# Altium PCB Smart-Car.PcbDoc (part 2 of 2)
Units mil, origin at the board's own origin, x right, y up, seen from the top; angles counter-clockwise.
Board outline 3864.45 x 1894.79 mil, 4 copper layers (Top Layer, Signal Layer 1, GND, Bottom Layer), stack 36.221 mil thick; 161 components, 132 nets, 578 pads, 430 vias.
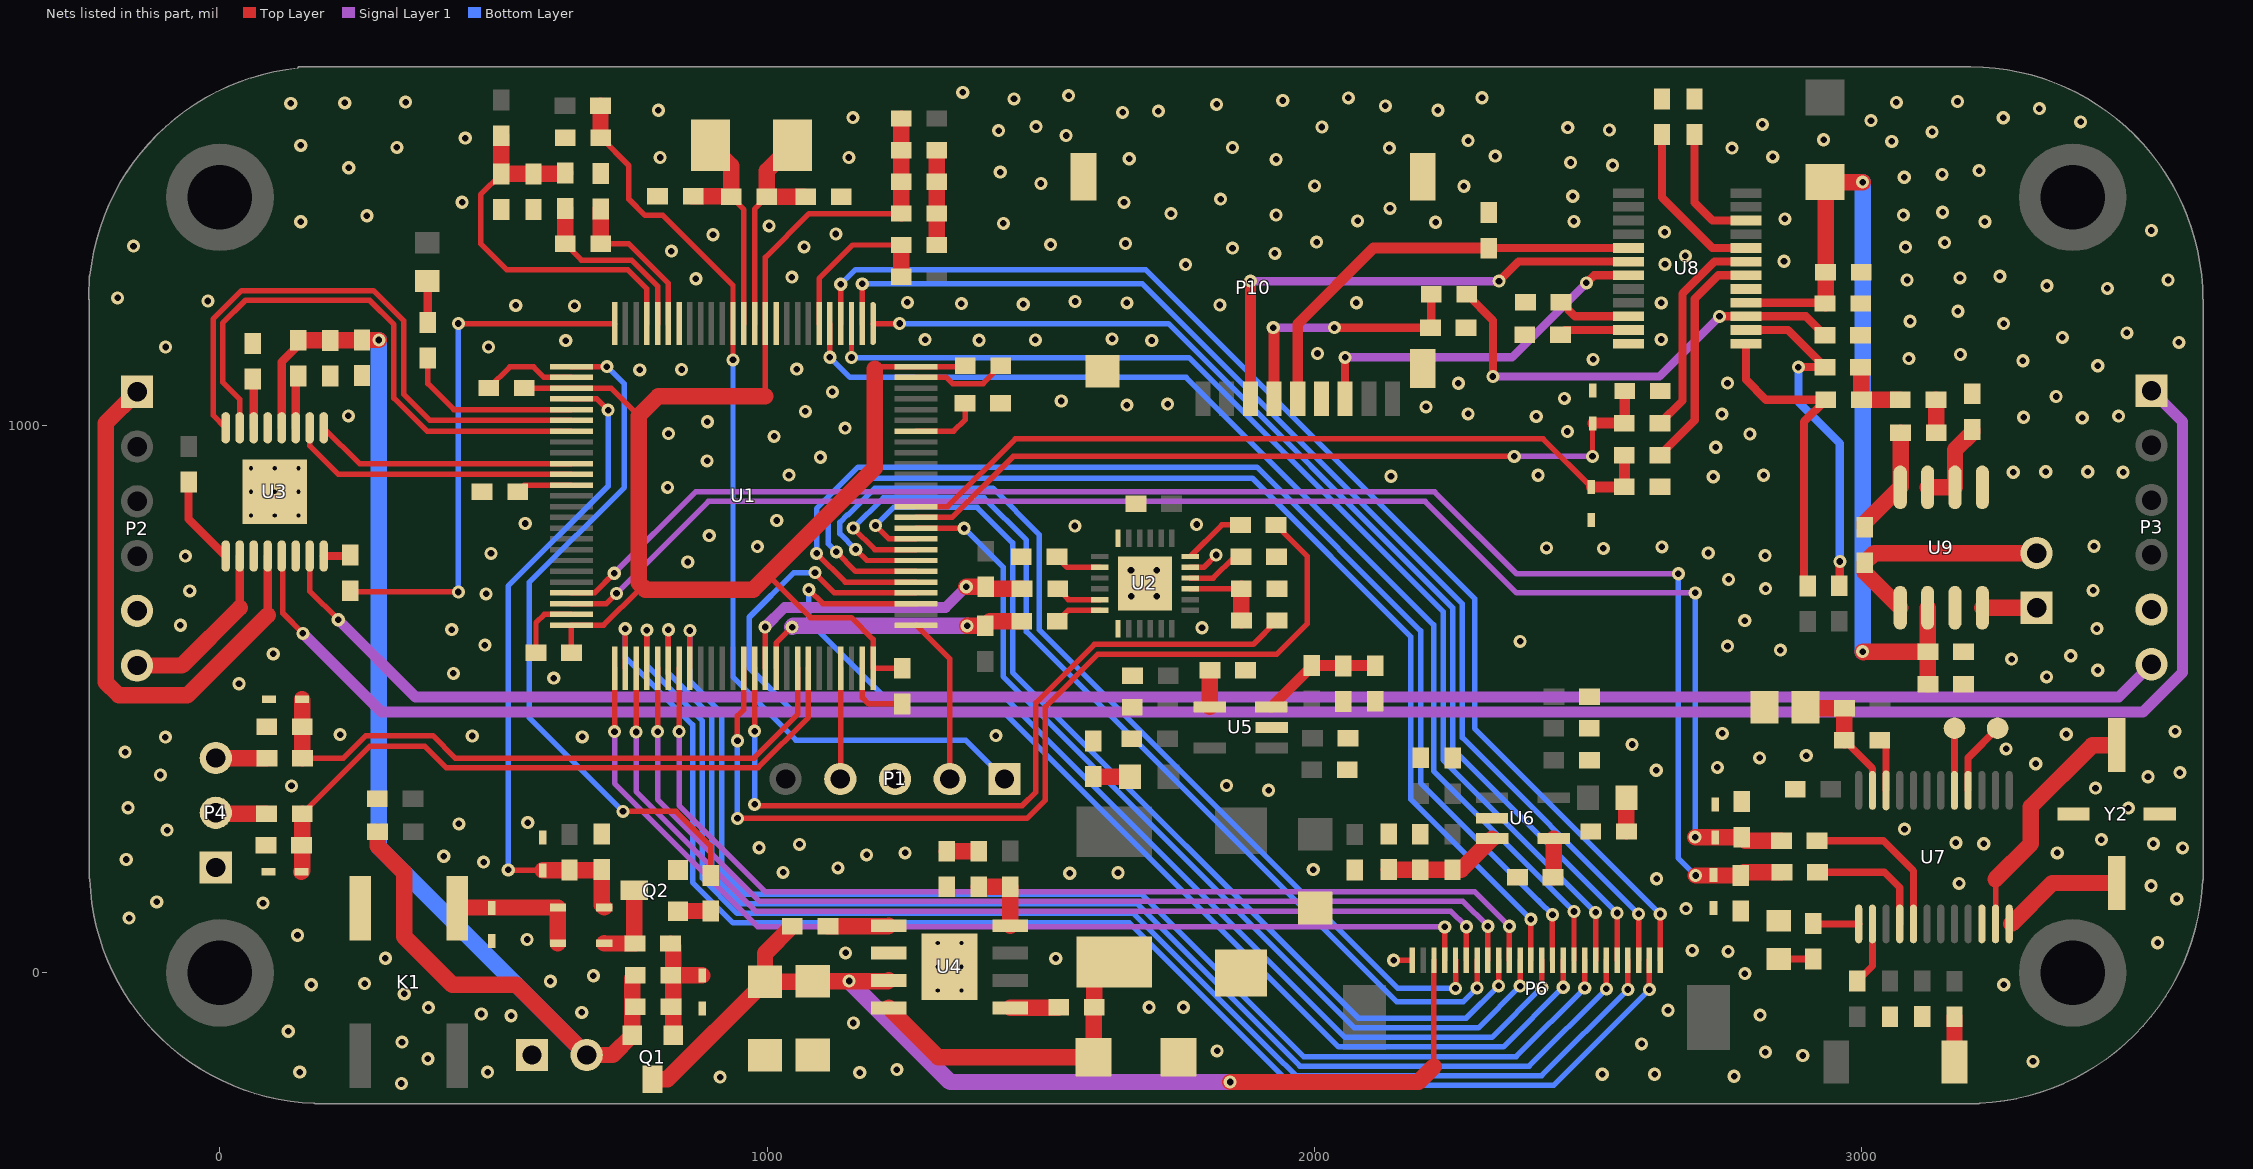
[diagram p4: the nets of this part, all layers, seen from the top]

## Via types
v1: diameter 24, hole 12, Top Layer to Bottom Layer, tented both sides, 415 vias
v2: diameter 19.68, hole 7.87, Top Layer to Bottom Layer, tented both sides, 15 vias

## Nets (pads, with @x,y where several pads share a name; then routed paths per layer and width w, separated by ;. In a path a pad name is that pad's centre, name@x,y a point inside that pad or via, vN(x,y) a via of type N, cw(c..) or ccw(c..) an arc to the next point about the centre after c; other vN are vias at no path point) (continued)
GND: C1.2 C2.1 C3.1 C4.1 C5.1 C6.1 C7.1 C8.1 C9.1 C10.1 C11.1 C12.1 C13.1 C15.1 C16.1 C17.1 C18.1 C19.2 C20.1 C22.1 C23.1 C25.1 C26.1 C27.2 C28.1 C29.2 C30.1 C31.1 C32.1 C33.1 C34.1 C35.1 C36.1 C38.1 C39.1 C40.1 C41.1 C42.1 C43.1 C44.1 C45.1 C46.1 C47.2 C49.2 C51.1 C52.1 C53.1 C54.1 C55.1 C56.1 C57.1 C58.1 C59.1 C60.1 C61.1 C64.1 C65.1 D2.1 D7.2 ESD1.1 ESD2.1 ESD3.1 ESD4.1 ESD5.1 ESD6.1 ESD7.1 ESD8.1 ESD9.1 K1.3 P1.3 P2.5 P3.5 P4.1 P5.1 P6.24 P10.0 P10.6 Q2.3 R2.2 R3.2 R7.1 R14.1 R15.1 R25.1 R28.1 R29.1 R34.1 R35.1 R43.1 R44.1 R45.1 R49.1 U1.10 U1.19 U1.27 U1.49 U1.74 U1.99 U2.1 U2.11 U2.18 U2.25 U3.3 U3.6 U3.13 U3.17 U4.6 U4.9 U5.2 U6.2 U7.22 U8.5 U8.24 U9.1 U9.7 Y2.3 Y2.4 | length 869.1
  Top Layer w10: C4.1@491.18,1068.78 529.7,1107.3 573.1,1107.3 592.16,1088.24 U1.27@642.35,1088.24 ; C3.1@577.58,585.28 577.58,639.98 592.77,655.17 U1.49@642.35,655.17 ; U1.74@1173.84,556.74 1173.84,503.16 1185.42,491.58 C2.1@1246.98,491.58 ; U1.99@1272.27,1088.24 1327.66,1088.24 1339.1,1076.8 1394.5,1076.8 C6.1@1426.88,1109.18 ; U2.11@1773.2,741.26 1798.06,741.26 v1(1820.4,763.6) ; v1(2144.8,23) P6.24@2179.23,23
  Top Layer w30: C9.1@1310.08,1330.18 C5.1@1310.08,1387.68 C10.1@1310.08,1446.08 C11.1@1310.08,1503.38
  other v1: 331.7,-202.2 914,-190.4 2767,-188.9 2526.2,-185.3 2621.8,-185.3 1169.3,-182.2 145.9,-181.2 489.1,-181.2 1237.2,-176.7 3313.3,-161.7 380,-157 2892.4,-151 2824.3,-144.7 1822.4,-142.5 2597.9,-129.8 332.7,-126.6 124.9,-106.6 1157.5,-91.6 532.2,-78.3 2814.7,-77.2 477.6,-75.1 661.1,-72.3 2646.3,-68.2 381,-63.6 1698.1,-62.8 1760.7,-62.8 336.9,-38.4 166.9,-21.6 3259.9,-21.6 264.5,-19.5 604,-15.2 682.4,-5.3 2786.7,-1.3 1527.3,26.4 302.3,26.7 1143.4,36.6 2756.2,39.3 2690.5,41.1 3540.9,55.1 561.3,61 141.7,68.7 -165.9,100.2 2679.1,117.5 78.7,127.5 -115.5,129.6 3575.9,135.1 3529.2,159.3 3178.2,163.5 2625.4,171.9 1552.9,182 1641.2,183 1029.3,183.5 1998,188.7 1129.3,191.8 481.8,202.3 -171.2,207.2 409,213.1 1181.7,215.6 1252,219.2 3357.5,219.3 985.2,228.7 3586.7,228.5 1059.1,234.7 3223.2,236 3533.4,236 3172.4,237.7 3438.3,243.5 -96.6,260.8 3078.5,262.7 436.8,272.3 562.6,274.5 3487.5,301 -168,301.7 1916.4,333.8 3427.5,337.7 130.8,341.7 1839.5,342.4 3523.4,358.5 -108.7,361.6 3581.7,366 2624.8,370.2 2736.5,375.6 3318.3,382.1 2813.6,392.9 2899,397.1 -173.3,403.5 3264.1,409.4 2580.6,417.4 -99.8,430.8 662.1,431.3 461,432.9 1418.1,433.6 219.6,435.3 3374,436 2745.5,437.7 3573,441.2 34.8,528.3 610.1,538.6 3338.1,540.8 426.7,547.4 3431.6,553 3274.2,573.5 3382.2,579.6 97.4,582.8 2851.7,589.8 2755,597.2 484.3,599 2376,605.7 423.7,627.2 3430.1,629 1794.7,630.6 -72.3,635.3 2786.6,643.7 1665.3,688 1711.6,688 486.3,692.5 -55.1,698 3423.2,699 2824.7,702.2 2756.9,719 1664.9,735.4 1712.1,735.8 854.8,750.9 -63.2,761.6 2823.8,762.6 495.4,766.6 2719.7,767.3 2528.2,775.7 2424.2,776.6 2635.1,778.4 982.3,778.9 3424.7,779.6 894.3,799.1 1562.3,816.7 1784.9,819.4 558,821.2 1017.5,826.7 818.1,887.1 2729,906.7 2140.1,907.5 2409,909.3 1040,909.6 2821,909.5 3277.2,914.9 3478,914.9 3336.5,915.7 3413.3,915.7 890.4,935.6 1097.2,942.4 2733.6,960.6 1012.7,980.3 819.7,985.4 2795.9,984.8 2462.4,989.4 1142.6,995.6 890.8,1007.1 3296.2,1015.3 3403.4,1014.5 2405.4,1017 234.8,1017.9 3469.6,1017.6 2744.8,1021 2281,1021.5 1070,1026 2204,1034.4 1657.4,1037.5 1731.9,1039.4 1537.5,1045.1 2457,1049.9 3355.5,1053.3 1119.3,1061.6 2263.3,1077.5 2755,1077.7 767.2,1101.8 843.8,1102.6 1054.2,1103.4 3431.6,1109.6 3294.7,1118.7 2509.3,1121 3086.4,1122.5 3180.7,1130.1 2005.8,1131.9 -99.4,1143.7 490.8,1143.7 3579.8,1152.2 631.9,1155.4 1387.3,1156.2 1702.8,1155.6 1288.8,1157.4 1490.2,1156.8 2634,1157.5 1630.3,1158.7 3367,1161.3 3484.8,1169.6 3259.7,1186.4 3088.7,1190.9 3176.1,1209.2 648,1219 540.5,1219.7 1827.4,1220.5 1468.1,1221.8 1355.1,1223.1 1657.4,1224.3 2634,1224.4 1256.3,1225.4 2076.9,1224.6 1562.7,1226.9 -21.9,1227.8 -187.1,1233.6 3449.1,1251 3338.8,1255.6 3083.3,1266.2 3560.1,1266.2 869.7,1268.6 3179.9,1270 1045.2,1271.5 3252.9,1273 1764.6,1294.3 2640.8,1295.1 2858.3,1300.4 2678.1,1310.3 1927.8,1314.8 825.1,1319.1 1850.4,1324.5 3080.3,1326.3 1067.5,1326.6 -157.9,1328 1518,1331 1654.9,1332.9 2004,1335.4 3151.8,1334.6 901,1348.9 1125.5,1350.3 2640.1,1353.6 3529.7,1356.7 1003.6,1365.2 1431.8,1369.7 2221.7,1371.7 147.8,1372.6 2474.3,1373.3 3225.5,1372.6 2079,1374.1 2859.8,1378 268.5,1383.5 1930.2,1385 3076.5,1384.8 1738,1387.4 3148,1390.1 2138.2,1397.1 442.5,1408.4 1652.1,1408 1828.7,1414 2472.2,1419.3 2000.4,1438.2 2273.3,1437.6 1500.2,1442.5 3078,1454 3147.2,1459.3 1425.9,1463.4 3214.9,1466.2 235.5,1471.3 2545.1,1476 2468.4,1480.9 1930.2,1486.6 1661.8,1487.8 804.3,1490.1 1149.3,1490.1 2837.8,1491.3 2330.6,1492.7 2137,1507.1 2763.2,1507.2 1850.4,1508.3 323.3,1508.6 147.8,1512.2 3055.2,1519.4 2280.9,1520.8 2930.5,1522.4 448.3,1525.4 1546.3,1530.3 3129,1536.9 1422.9,1539.2 2539.2,1540.3 2463,1544.6 2013.7,1545.8 1491.3,1546.6 2818.8,1550.6 3400.4,1555.1 3017.2,1557.4 1156.7,1563 3259,1562.7 1649.7,1572.4 1715,1574.9 801.3,1576.4 2225.8,1576.5 3325.1,1579.5 2129.8,1584.5 1821.4,1587 129.5,1589 228.2,1589.8 339.4,1591.2 3063.6,1590.9 3175.3,1592.4 1942.3,1594.2 1451.1,1597.2 2062.1,1599 2306.3,1599.2 1550.8,1603.1 1357.5,1609.1
  other v2: 1311.73,-32.13 1355.03,-32.13 1311.73,11.18 1355.03,11.18 1311.73,54.48 1355.03,54.48 56.79,835.69 100.1,835.69 143.41,835.69 56.79,878.99 100.1,878.99 143.41,878.99 56.79,922.3 100.1,922.3 143.41,922.3
IOB: R44.2 U8.8 | length 306.7
  Top Layer w15: R44.2@2635.3,1532 2635.3,1416.7 2727.2,1324.8 U8.8@2788.67,1324.8
IOC: R45.2 U8.10 | length 231.9
  Top Layer w15: R45.2@2694.7,1532 2694.7,1407.7 2727.6,1374.8 U8.10@2788.67,1374.8
KEY-EINT: C38.2 D5.1 ESD4.2 R27.1 U1.29 | length 1234.4
  Top Layer w10: v1(526.8,188.2) 527.52,187.48 ESD4.2@589.68,187.48 ; U1.29@642.35,1048.87 688.83,1048.87 v1(709.3,1028.4)
  Top Layer w30: ESD4.2@589.68,187.48 696.38,187.48 C38.2@697.78,188.88 697.78,124.1 D5.1@702.4,119.48
  Bottom Layer w10: v1(526.8,188.2) 526.8,706.8 709.3,889.3 v1(709.3,1028.4)
LED: R20.1 U1.30 | length 329.2
  Top Layer w10: R20.1@379.9,1123.8 379.9,1076.7 427.42,1029.18 U1.30@642.35,1029.18
M1-BOOT0: R2.1 U1.94 | length 128
  Top Layer w10: U1.94@1272.27,989.81 1340.71,989.81 1361.6,1010.7 R2.1@1361.6,1040.7
M1-BOOT1: R3.1 U1.37 | length 103.3
  Top Layer w10: R3.1@544.1,879.1 556.39,891.39 U1.37@642.35,891.39
M1-REST: C1.1 P1.1 R1.2 U1.14 | length 1737.3
  Top Layer w10: C1.1@695.98,1526.28 747.1,1475.16 747.1,1414.1 776.9,1384.3 809.7,1384.3 937.62,1256.38 U1.14@937.62,1186.66 v1(937.62,1120.18)
  Top Layer w30: R1.2@695.48,1584.98 695.48,1526.78 C1.1@695.98,1526.28
  Bottom Layer w10: v1(937.62,1120.18) 937.62,540.28 1052.4,425.5 1362.56,425.5 P1.1@1433.68,354.38
M1-SWCLK: P1.2 U1.76 | length 306.5
  Top Layer w10: U1.76@1272.27,635.48 1333.68,574.07 P1.2@1333.68,354.38
M1-SWDIO: P1.4 U1.72 | length 202.7
  Top Layer w10: P1.4@1133.68,354.38 1134.47,355.17 U1.72@1134.47,556.74
M1-VBAT: C9.2 R5.2 U1.6 | length 315.4
  Top Layer w10: U1.6@1095.1,1186.66 1095.1,1268.9 1156.38,1330.18 C9.2@1245.08,1330.18
  Top Layer w30: R5.2@1245.08,1272.38 C9.2@1245.08,1330.18
M1-VDD: C2.2 C3.2 C4.2 C5.2 C6.2 C10.2 C11.2 L1.2 U1.11 U1.28 U1.50 U1.75 U1.100 | length 2928
  Top Layer w10: C4.2@556.18,1068.78 556.4,1068.55 U1.28@642.35,1068.55 714.95,1068.55 765.4,1018.1 ; C3.2@642.58,585.28 642.35,585.51 U1.50@642.35,635.48 701.33,635.48 766.35,700.5 777.6,700.5 782.5,700.5 ; 996.68,1053.7 U1.11@996.68,1186.66 996.68,1307.48 1076.88,1387.68 C5.2@1245.08,1387.68 ; 1000,726 1002.1,726 1079,649.1 1153.8,649.1 1193.53,609.37 U1.75@1193.53,556.74 1193.69,556.58 C2.2@1246.98,556.58 ; 1196.6,1103.7 1200.82,1107.92 U1.100@1272.27,1107.92 1360.63,1107.92 C6.2@1361.88,1109.18
  Top Layer w30: 777.6,700.5 765.4,712.7 765.4,1018.1 801,1053.7 996.68,1053.7 ; 782.5,700.5 974.5,700.5 1000,726 1196.6,922.6 1196.6,1103.7 ; C5.2@1245.08,1387.68 L1.2@1245.08,1561.28
M1-VDDA: C12.2 C13.2 L2.2 R6.1 U1.22 | length 731.7
  Top Layer w10: C13.2@514.28,1460.08 476.4,1422.2 476.4,1332.61 524,1285.01 745.09,1285.01 780.14,1249.96 U1.22@780.14,1186.66
  Top Layer w30: L2.2@514.28,1529.88 C13.2@514.28,1460.08 C12.2@572.98,1460.08 629.48,1460.08 R6.1@631.08,1461.68
M1-VREF+: C14.2 R6.2 U1.21 | length 333.6
  Top Layer w10: C14.2@631.08,1332.08 660.46,1302.7 752.15,1302.7 799.83,1255.02 U1.21@799.83,1186.66
  Top Layer w30: C14.2@631.08,1332.08 R6.2@631.08,1396.68
M1-VREF-: C14.1 R7.2 U1.20 | length 290.7
  Top Layer w10: C14.1@696.08,1332.08 747.52,1332.08 819.51,1260.09 U1.20@819.51,1186.66
  Top Layer w30: R7.2@695.88,1395.98 695.88,1332.28 C14.1@696.08,1332.08
MPU_AD0: R16.1 U1.64 | length 1441.5
  Top Layer w10: v1(976.99,307.99) 976.99,305.7 1466.2,305.7 1490.9,330.4 1490.9,493.55 1597.85,600.5 1888.34,600.5 R16.1@1931.78,643.94 ; v1(976.99,441.69) U1.64@976.99,556.74
  Bottom Layer w10: v1(976.99,307.99) v1(976.99,441.69)
MPU_INT: R13.1 U1.63 | length 1771.8
  Top Layer w10: v1(945.8,282.2) 1474.7,282.2 1508.4,315.9 1508.4,486.3 1604.5,582.4 1931.6,582.4 1986.8,637.6 1986.8,761.82 R13.1@1930.08,818.54 ; v1(945.8,424.3) 945.8,469.5 957.31,481.01 U1.63@957.31,556.74
  Bottom Layer w10: v1(945.8,282.2) v1(945.8,424.3)
NetC16_2: C16.2 U2.20 | length 86.1
  Top Layer w10: C16.2@1529.48,760.14 1548.35,741.26 U2.20@1607.76,741.26
NetC17_2: C17.2 U2.10 | length 108.5
  Top Layer w10: U2.10@1773.2,721.58 1815.02,721.58 1853.68,760.24 C17.2@1865.68,760.24
NetC19_1: C19.1 U3.14 | length 90.1
  Top Layer w15: C19.1@59.8,1085.39 61.71,1083.48 U3.14@61.71,996.12
NetC21_1: C21.1 U3.11 | length 98.3
  Top Layer w15: U3.11@138.49,996.12 138.49,1086.69 C21.1@142.8,1091 C21.1@141.2,1091
NetC24_1: C24.1 U4.1 | length 88.7
  Top Layer w30: U4.1@1444.6,-63.82 1531.98,-63.82 C24.1@1532.88,-62.92
NetC24_2: C24.2 D2.2 L3.1 U4.8 | length 601.7
  Top Layer w30: U4.8@1222.16,-63.82 1312.63,-154.3 D2.2@1596.6,-154.3 1596.6,-64.2 C24.2@1597.88,-62.92 1597.88,-16.12 L3.1@1633.98,19.98
NetC35_2: C35.2 R26.1 R28.2 U5.3 | length 222.9
  Top Layer w20: U5.3@1921.2,485.9 1995.18,559.87 R26.1@1995.18,561.68 2111.28,561.68 C35.2@2111.58,561.38
NetC36_2: C36.2 U5.4 | length 67
  Top Layer w30: U5.4@1809,485.9 1809.1,486 C36.2@1809.1,552.9
NetC37_2: C37.2 ESD3.2 Q1.1 R30.1 R31.2 | length 227.4
  Top Layer w30: R30.1@823.48,53.68 828.58,48.58 C37.2@828.58,-4.42 ; C37.2@823.88,-4.42 C37.2@828.58,-4.42 ; Q1.1@828.58,-114.12 C37.2@828.58,-4.42 ; ESD3.2@881.28,-4.72 880.98,-4.42 C37.2@828.58,-4.42
NetC44_2: C44.2 R33.1 R34.2 U6.3 | length 213.1
  Top Layer w30: C44.2@2135.98,188.68 2251.98,188.68 R33.1@2252.38,188.28 2268.18,188.28 U6.3@2325.28,245.38
NetC45_2: C45.2 U6.4 | length 70.8
  Top Layer w30: C45.2@2436.28,175.08 2437.48,176.28 U6.4@2437.48,245.38
NetC53_2: C53.2 U8.23 | length 128.1
  Top Layer w15: C53.2@2449.6,1166.1 2458.3,1174.8 U8.23@2574.1,1174.8
NetC55_2: C55.2 U8.22 | length 134.1
  Top Layer w15: C55.2@2450.6,1225.5 2476.3,1199.8 U8.22@2574.1,1199.8
NetC60_2: C60.2 P10.4 R46.1 | length 478.6
  Top Layer w15: v1(2036.7,1179.1) C60.2@2212.2,1179.1 2213.6,1180.5 R46.1@2213.6,1240.2
  Top Layer w20: P10.4@1926.31,1049.4 v1@1926.31,1179.1
  Signal Layer 1 w15: v1(1925,1179.1) v1(2036.7,1179.1)
NetC61_2: C61.2 U9.2 U9.3 | length 169.1
  Top Layer w30: U9.3@3120.7,887.3 U9.2@3170.7,887.3 3170.7,955.78 3202.6,987.68 C61.2@3202.6,993.2
NetC62_1: C62.1 C63.2 C66.2 | length 131.6
  Top Layer w30: C66.2@2998.3,1107 2999.7,1105.6 C63.2@2999.7,1047.2 3000.1,1047.6 C62.1@3070.8,1047.6
NetC62_2: C62.2 R47.1 | length 60.5
  Top Layer w30: C62.2@3135.8,1047.6 3136.4,1047 R47.1@3136.4,987.3
NetD1_2: D1.2 R20.2 | length 75.8
  Top Layer w15: D1.2@379.2,1264.3 379.9,1263.6 R20.2@379.9,1188.8
NetD3_2: D3.2 R29.2 | length 67.6
  Top Layer w30: R29.2@1595.88,358.78 1662.88,358.78 D3.2@1663.28,358.38
NetD4_1: D4.1 Q2.2 R30.2 | length 154.1
  Top Layer w30: D4.1@702.2,53.78 702.3,53.68 R30.2@758.48,53.68 757.18,54.98 Q2.2@757.18,150.88
NetD4_2: D4.2 D5.2 ESD5.2 K1.1 | length 250.4
  Top Layer w30: K1.1@433.84,117.88 435.44,119.48 D5.2@617.76,119.48 617.56,119.28 D4.2@617.56,53.78
NetD6_2: D6.2 R35.2 | length 62
  Top Layer w30: R35.2@2570.28,258.38 D6.2@2570.28,320.38
NetD7_1: D7.1 R40.2 | length 62.9
  Top Layer w13: D7.1@2848.9,25.3 2849.1,25.1 R40.2@2911.7,25.1
NetP8_1: P8.1 R37.2 | length 82.7
  Top Layer w30: R37.2@3169.8,-80.2 3169.8,-162.46 P8.1@3170.14,-162.8
NetP11_1: P11.1 U9.8 | length 99.2
  Top Layer w30: U9.8@3220.7,667.3 3319.6,667.3 P11.1@3319.8,667.1
NetP11_2: P11.2 R48.2 U9.5 | length 430
  Top Layer w30: U9.5@3070.7,667.3 3006,732 R48.2@3006,749.4 3023.7,767.1 P11.2@3319.8,767.1
NetQ2_1: Q2.1 R32.2 | length 59.7
  Top Layer w30: Q2.1@837.18,112.88 837.38,113.08 R32.2@896.78,113.08
NetR9_2: R9.2 U2.23 | length 84.8
  Top Layer w10: R9.2@1530.98,701.64 1550.41,682.21 U2.23@1607.76,682.21
NetR12_2: R12.2 U2.24 | length 85.7
  Top Layer w10: R12.2@1530.28,642.64 1550.17,662.52 U2.24@1607.76,662.52
NetR13_2: R13.2 U2.12 | length 115.7
  Top Layer w10: U2.12@1773.2,760.95 1830.79,818.54 R13.2@1865.08,818.54
NetR14_2: R14.2 R16.2 U2.9 | length 151.8
  Top Layer w10: U2.9@1773.2,701.89 1866.14,701.89 R14.2@1866.48,702.24
  Top Layer w30: R14.2@1866.48,702.24 1866.48,644.24 R16.2@1866.78,643.94
NetR18_1: R18.1 U3.1 | length 163.2
  Top Layer w15: R18.1@-57.2,897 -57.2,829.6 U3.1@10.53,761.87
NetR21_1: R21.1 U3.8 | length 48.9
  Top Layer w15: U3.8@189.67,761.87 236.27,761.87 R21.1@237.9,763.5
NetR22_2: R22.2 U4.5 | length 111.5
  Top Layer w30: R22.2@1110.98,85.48 1221.46,85.48 U4.5@1222.16,86.18
NetR23_1: R23.1 R24.2 U4.4 | length 129.2
  Top Layer w30: R24.2@1386.78,157.28 1387.08,157.58 R23.1@1444.28,157.58 1444.6,157.26 U4.4@1444.6,86.18
NetR24_1: R24.1 R25.2 | length 58.9
  Top Layer w30: R25.2@1327.88,222.28 R24.1@1386.78,222.28
NetR39_2: R39.2 U7.14 | length 116
  Top Layer w13: R39.2@2992.1,-15.1 3019.8,12.6 U7.14@3019.8,89.41
NetR40_1: R40.1 U7.13 | length 83.4
  Top Layer w13: R40.1@2911.7,90.1 2912.39,89.41 U7.13@2994.8,89.41
NetR47_2: R47.2 R48.1 U9.4 | length 200
  Top Layer w30: R48.1@3006,814.4 3006,822.6 U9.4@3070.7,887.3 3071.4,888 R47.2@3071.4,987.3
NFAULT: R21.2 U1.25 | length 974.8
  Top Layer w10: R21.2@237.9,698.5 240.34,696.06 v1(435.74,696.06) ; v1(435.74,1186.66) U1.25@721.09,1186.66
  Bottom Layer w10: v1(435.74,696.06) v1(435.74,1186.66)
OSCI: U7.23 Y2.1 | length 444.4
  Top Layer w10: U7.23@3244.8,89.41 3244.8,171.4
  Top Layer w30: 3244.8,171.4 3309.1,235.7 3309.1,303.4 3421.88,416.18 Y2.1@3466.2,416.18
OSCO: U7.24 Y2.2 | length 223.4
  Top Layer w30: U7.24@3273.8,89.41 3348.61,164.22 Y2.2@3466.2,164.22
OUTA1: P2.6 U3.2 | length 336.8
  Top Layer w15: 36.12,667.32 U3.2@36.12,761.87
  Top Layer w30: P2.6@-162.4,561.7 P2.6@-151.4,561.7 -69.5,561.7 36.12,667.32
OUTA2: P2.1 U3.4 | length 1029.3
  Top Layer w15: 87.3,653.9 U3.4@87.3,761.87
  Top Layer w30: P2.1@-151.4,1061.7 -208.9,1004.2 -208.9,531 -185.1,507.2 -59.4,507.2 87.3,653.9
OUTB1: P3.6 U3.7 | length 3535
  Top Layer w10: U3.7@164.08,761.87 164.08,697.62 v1(216.3,645.4)
  Signal Layer 1 w20: v1(216.3,645.4) 357.6,504.1 3470,504.1 P3.6@3529.9,564
OUTB2: P3.1 U3.5 | length 4220.7
  Top Layer w10: U3.5@112.9,761.87 114.8,759.96 114.8,657.4 v1(151.7,620.5)
  Signal Layer 1 w20: v1(151.7,620.5) 295.6,476.6 3514.6,476.6 3586.6,548.6 3586.6,1007.3 P3.1@3529.9,1064
PB12: P6.21 U1.51 | length 1897.4
  Top Layer w10: v1(721.09,440.81) U1.51@721.09,556.74 ; P6.21@2238.29,23 v1(2238.29,84.01)
  Signal Layer 1 w10: v1(721.09,440.81) 721.09,346.11 983.19,84.01 v1(2238.29,84.01)
PB13: P6.2 U1.52 | length 2614.5
  Top Layer w10: U1.52@740.77,556.74 v1(740.77,628.83) ; v1(2612.3,-30.49) P6.2@2612.3,23
  Bottom Layer w10: v1(740.77,628.83) 740.77,576.43 864,453.2 864,165.3 938,91.3 1662.15,91.3 1958.85,-205.4 2437.4,-205.4 v1(2612.3,-30.49)
PB14: P6.19 U1.53 | length 1906.3
  Top Layer w10: v1(760.46,440.14) U1.53@760.46,556.74 ; P6.19@2277.66,23 v1(2277.7,84.4) v1(2277.7,84.4)
  Signal Layer 1 w10: v1(760.46,440.14) 760.46,331.49 978.95,113 2249.1,113 v1(2277.7,84.4)
PB15: P6.4 U1.54 | length 2524.8
  Top Layer w10: U1.54@780.14,556.74 v1(780.14,626.36) ; v1(2572.93,-30.36) P6.4@2572.93,23
  Bottom Layer w10: v1(780.14,626.36) 780.14,561.99 881.51,460.62 881.51,172.54 945.25,108.8 1669.4,108.8 1924.34,-146.14 1966.1,-187.9 2415.4,-187.9 v1(2572.93,-30.36)
PC10: P6.12 U1.78 | length 2005.4
  Top Layer w10: v1(1076.4,700.1) 1101.65,674.85 U1.78@1272.27,674.85 ; v1(2415.46,-26.65) P6.12@2415.46,23
  Bottom Layer w10: v1(1076.4,700.1) 1076.4,642.4 1216.3,502.5 1435.8,502.5 2056.2,-117.9 2324.2,-117.9 v1(2415.46,-26.65)
PC11: P6.10 U1.79 | length 2316.6
  Top Layer w10: v1(1087.5,731.6) 1087.5,729.7 1122.66,694.54 U1.79@1272.27,694.54 ; v1(2454.83,-26.18) P6.10@2454.83,23
  Bottom Layer w10: v1(1087.5,731.6) 1049,731.6 967.3,649.9 967.3,557.6 1046.1,478.8 1430.3,478.8 2044.5,-135.4 2345.6,-135.4 v1(2454.83,-26.18)
PC12: P6.11 U1.80 | length 2261.6
  Top Layer w10: v1(1090.5,766.5) 1142.78,714.22 U1.80@1272.27,714.22 ; P6.11@2435.14,23 v1(2435.14,106.26)
  Bottom Layer w10: v1(1090.5,766.5) 1090.5,848.3 1166.3,924.1 1895,924.1 2194,625.1 2194,347.2 2420.9,120.3 ; 2410,131.4 v1(2435.14,106.26)
PD0: P6.13 U1.81 | length 2125.4
  Top Layer w10: v1(1126.6,769.2) 1161.89,733.91 U1.81@1272.27,733.91 ; P6.13@2395.77,23 v1(2395.77,97.93)
  Bottom Layer w10: v1(1126.6,769.2) 1111.7,784.1 1111.7,831.4 1184.2,903.9 1886.63,903.9 2176.5,614.03 2176.5,317.2 v1(2395.77,97.93)
PD1: P6.20 U1.82 | length 1862.8
  Top Layer w10: v1(1161.9,773.8) 1182.11,753.59 U1.82@1272.27,753.59 ; v1(2257.97,-28.23) P6.20@2257.97,23
  Bottom Layer w10: v1(1161.9,773.8) 1132.8,802.9 1132.8,823.2 1147.15,837.55 1148.65,837.55 1196.8,885.7 1412.3,885.7 1497,801 1497,627.2 2152.42,-28.23 v1(2257.97,-28.23)
PD2: P6.18 U1.83 | length 1834.8
  Top Layer w10: v1(1157.3,813.05) 1197.07,773.28 U1.83@1272.27,773.28 ; v1(2297.34,-27.55) P6.18@2297.34,23
  Bottom Layer w10: v1(1157.3,813.05) 1212.45,868.2 1396.5,868.2 1473.7,791 1473.7,623.7 2150.13,-52.73 2272.17,-52.73 v1(2297.34,-27.55)
PD3: P6.16 U1.84 | length 1833.5
  Top Layer w10: v1(1198,817.5) 1222.54,792.96 U1.84@1272.27,792.96 ; v1(2336.71,-23.69) P6.16@2336.71,23
  Bottom Layer w10: v1(1198,817.5) 1231.2,850.7 1383.7,850.7 1448.7,785.7 1448.7,548.95 2080.55,-82.9 2277.5,-82.9 v1(2336.71,-23.69)
PD4: P6.14 U1.85 | length 1677.8
  Top Layer w10: U1.85@1272.27,812.65 v1(1360.05,812.65) ; v1(2376.08,-24.09) P6.14@2376.08,23
  Bottom Layer w10: v1(1360.05,812.65) 1431.2,741.5 1431.2,541.7 2073.3,-100.4 2299.77,-100.4 v1(2376.08,-24.09)
PD8: P6.17 U1.55 | length 1915.3
  Top Layer w10: v1(799.83,440.77) U1.55@799.83,556.74 ; P6.17@2317.03,23 v1(2317.03,85.27)
  Signal Layer 1 w10: v1(799.83,440.77) 799.83,316.87 986,130.7 2271.6,130.7 v1(2317.03,85.27)
PD9: P6.6 U1.56 | length 2440.7
  Top Layer w10: U1.56@819.51,556.74 v1(819.51,626.99) ; v1(2533.57,-29.27) P6.6@2533.57,23
  Bottom Layer w10: v1(819.51,626.99) 819.51,547.6 899.17,467.94 899.17,179.62 952.5,126.3 1676.65,126.3 1973.35,-170.4 2392.43,-170.4 v1(2533.57,-29.27)
PD10: P6.15 U1.57 | length 1921.6
  Top Layer w10: v1(839.2,441.1) U1.57@839.2,556.74 ; P6.15@2356.4,23 v1(2356.4,85.1)
  Signal Layer 1 w10: v1(839.2,441.1) 839.2,305.9 996.9,148.2 2293.3,148.2 v1(2356.4,85.1)
PD11: P6.8 U1.58 | length 2352.2
  Top Layer w10: U1.58@858.88,556.74 v1(858.88,625.62) ; v1(2494.2,-27.4) P6.8@2494.2,23
  Bottom Layer w10: v1(858.88,625.62) 858.88,532.98 916.67,475.19 916.67,186.87 959.75,143.8 1683.9,143.8 1980.6,-152.9 2368.7,-152.9 v1(2494.2,-27.4)
PE2: P6.5 U1.1 | length 2043.1
  Top Layer w10: U1.1@1193.53,1186.66 v1(1241.96,1186.66) ; P6.5@2553.25,23 v1(2553.25,109.45)
  Bottom Layer w10: v1(1241.96,1186.66) 1733.39,1186.66 2252.8,667.25 2252.8,409.9 v1(2553.25,109.45)
PE3: P6.3 U1.2 | length 2195.9
  Top Layer w10: U1.2@1173.84,1186.66 v1(1173.84,1258.96) ; P6.3@2592.62,23 v1(2592.62,107.68)
  Bottom Layer w10: v1(1173.84,1258.96) 1685.84,1258.96 2270.3,674.5 2270.3,430 v1(2592.62,107.68)
PE4: P6.7 U1.3 | length 2088.1
  Top Layer w10: v1(1154.16,1124.54) U1.3@1154.16,1186.66 ; P6.7@2513.88,23 v1(2513.88,110.52)
  Bottom Layer w10: v1(1154.16,1124.54) 1770.76,1124.54 2235.3,660 2235.3,389.1 v1(2513.88,110.52)
PE5: P6.1 U1.4 | length 2291.8
  Top Layer w10: U1.4@1134.47,1186.66 v1(1134.47,1258.33) ; P6.1@2631.99,23 v1(2631.99,107.61)
  Bottom Layer w10: v1(1134.47,1258.33) 1161.44,1285.3 1691.6,1285.3 2293,683.9 2293,446.6 v1(2631.99,107.61)
PE6: P6.9 U1.5 | length 2086.5
  Top Layer w10: v1(1114.79,1124.91) U1.5@1114.79,1186.66 ; P6.9@2474.51,23 v1(2474.51,112.2)
  Bottom Layer w10: v1(1114.79,1124.91) 1151.6,1088.1 1765.5,1088.1 2217.8,635.8 2217.8,368.91 v1(2474.51,112.2)
POWER_OUT: R32.1 U1.26 | length 1273.7
  Top Layer w10: U1.26@642.35,1107.92 v1(707.22,1107.92) ; v1(736.6,295) 833.8,295 896.78,232.02 R32.1@896.78,178.08
  Bottom Layer w10: v1(707.22,1107.92) 738.9,1076.24 738.9,887.2 565.6,713.9 565.6,466 v1(736.6,295)
PWM1: U1.31 U3.16 | length 1061.2
  Top Layer w10: U3.16@10.53,996.12 -12.4,1019.05 -12.4,1194.65 39.65,1246.7 280.6,1246.7 335.51,1191.79 335.51,1057.51 383.52,1009.5 U1.31@642.35,1009.5
PWM2: U1.32 U3.15 | length 1036.5
  Top Layer w10: U3.15@36.12,996.12 36.12,1048.48 5.1,1079.5 5.1,1187.4 46.9,1229.2 273.35,1229.2 318.01,1184.54 318.01,1050.26 378.46,989.81 U1.32@642.35,989.81
PWM3: U1.35 U3.9 | length 479.8
  Top Layer w10: U3.9@189.67,996.12 255.03,930.76 U1.35@642.35,930.76
PWM4: U1.36 U3.10 | length 532.5
  Top Layer w10: U3.10@164.08,996.12 164.08,963.62 216.63,911.07 U1.36@642.35,911.07
RXD1: C20.2 ESD2.2 R19.2 U1.69 | length 1226.8
  Top Layer w10: R19.2@150.3,290.7 274,414.4 373.9,414.4 413.2,375.1 983.4,375.1 1075.42,467.12 U1.69@1075.42,556.74
  Top Layer w30: ESD2.2@148.8,184.9 150.3,186.4 R19.2@150.3,290.7
RXD2: C59.2 ESD9.2 R42.2 U1.87 | length 1440.2
  Top Layer w10: U1.87@1272.27,852.02 1330.02,852.02 1453.7,975.7 2418.16,975.7 ESD9.2@2506,887.86
  Top Layer w20: ESD9.2@2506,887.86 2506.24,888.1 C59.2@2566.5,888.1 R42.2@2566.5,946.3
RXD3: C52.2 ESD7.2 R38.2 U1.48 | length 2806.9
  Top Layer w10: U1.48@642.35,674.85 706.05,674.85 v1(724.7,693.5)
  Top Layer w30: v1(2695.9,248) C52.2@2780.7,248 2787.2,241.5 R38.2@2853.5,241.5
  Signal Layer 1 w10: v1(724.7,693.5) 892.7,861.5 2202.4,861.5 2369.4,694.5 v1(2696,694.5)
  Bottom Layer w10: v1(2695.9,248) v1@2695.9,694.5
SCL: R8.2 R9.1 U1.65 | length 577.5
  Top Layer w10: v1(996.2,632.1) 996.68,631.62 U1.65@996.68,556.74
  Top Layer w30: v1(1363.84,705.64) R8.2@1399.58,705.64 1403.58,701.64 R9.1@1465.98,701.64
  Signal Layer 1 w20: v1(996.2,632.1) 1032.2,668.1 1326.3,668.1 v1(1363.84,705.64)
SDA: R11.2 R12.1 U1.66 | length 511.5
  Top Layer w10: U1.66@1016.36,556.74 1016.36,602.86 v1(1045.5,632)
  Top Layer w30: v1(1365.46,634.24) R11.2@1398.48,634.24 1406.88,642.64 R12.1@1465.28,642.64
  Signal Layer 1 w30: v1(1045.5,632) 1047.74,634.24 v1(1365.46,634.24)
SGND-BT: C48.1 C50.1 R49.2 U7.11 | length 243.5
  Top Layer w13: C50.1@2968.3,425.3 3019.8,373.8 U7.11@3019.8,333.5
  Top Layer w30: R49.2@2897.3,485.3 2899.3,483.3 C48.1@2968.7,483.3 2968.3,482.9 C50.1@2968.3,425.3
TXD1: C18.2 ESD1.2 R17.2 U1.68 | length 1165.2
  Top Layer w10: R17.2@150.8,391.9 225.2,391.9 266.7,433.4 389,433.4 429.8,392.6 976.15,392.6 1055.73,472.18 U1.68@1055.73,556.74
  Top Layer w30: ESD1.2@150,500.2 150.8,499.4 R17.2@150.8,391.9
TXD2: C54.2 ESD8.2 R41.2 U1.86 | length 1459.7
  Top Layer w10: U1.86@1272.27,832.33 1338.17,832.33 1449.74,943.9 v1(2365.3,943.9) ; v1(2508.3,943.9) 2508.3,1003.64 ESD8.2@2508.8,1004.14
  Top Layer w20: ESD8.2@2508.8,1004.14 2509.16,1004.5 R41.2@2566.5,1004.5 2567.2,1005.2 C54.2@2567.2,1063.4
  Signal Layer 1 w10: v1(2365.3,943.9) v1(2508.3,943.9)
TXD3: C46.2 ESD6.2 R36.2 U1.47 | length 2885.9
  Top Layer w10: U1.47@642.35,694.54 684.74,694.54 v1(720.6,730.4)
  Top Layer w30: v1(2696.8,178) C46.2@2779.1,178 2784.9,183.8 R36.2@2854.4,183.8
  Signal Layer 1 w10: v1(720.6,730.4) 869.2,879 2219.9,879 2369.5,729.4 v1(2665.2,729.4)
  Bottom Layer w10: v1@2664.7,729.4 2664.7,210.1 v1(2696.8,178)
U1-OSCIN: C7.2 R4.2 U1.12 Y1.2 | length 422.7
  Top Layer w10: U1.12@976.99,1186.66 976.99,1395.79 R4.2@999.28,1418.08
  Top Layer w30: Y1.2@1046.29,1512.58 999.28,1465.57 R4.2@999.28,1418.08 C7.2@1067.38,1418.08
U1-OSCOUT: C8.2 R4.1 U1.13 Y1.1 | length 420.9
  Top Layer w10: R4.1@934.28,1418.08 957.31,1395.05 U1.13@957.31,1186.66
  Top Layer w30: C8.2@861.78,1418.88 C8.2@864.78,1418.88 930.48,1418.88 R4.1@931.28,1418.08 ; Y1.1@896.68,1512.58 934.28,1474.98 R4.1@934.28,1418.08
UART_RX1: P4.2 R19.1 | length 93.7
  Top Layer w30: P4.2@-7.58,292.58 -5.7,290.7 R19.1@85.3,290.7
UART_RX2: R41.1 U8.7 | length 394.1
  Top Layer w15: R41.1@2631.5,1004.5 2672.5,1045.5 2672.5,1241.2 2731.1,1299.8 U8.7@2788.67,1299.8
UART_RX3: R36.1 U7.16 | length 228.6
  Top Layer w13: R36.1@2919.4,183.8 3042.2,183.8 3069.8,156.2 U7.16@3069.8,89.41
UART_TX1: P4.3 R17.1 | length 93.7
  Top Layer w30: P4.3@-7.58,392.58 -6.9,391.9 R17.1@85.8,391.9
UART_TX2: R42.1 U8.6 | length 423.3
  Top Layer w15: R42.1@2631.5,946.3 2695,1009.8 2695,1231.88 2737.92,1274.8 U8.6@2788.67,1274.8
UART_TX3: R38.1 U7.17 | length 296.2
  Top Layer w13: R38.1@2918.5,241.5 3039.8,241.5 3094.8,186.5 U7.17@3094.8,89.41
USBDM: P9.2 U7.4 | length 135.8
  Top Layer w13: U7.4@3194.8,333.5 3194.8,393.26 P9.2@3248.54,447
USBDP: P9.1 U7.5 | length 113.5
  Top Layer w13: U7.5@3169.8,333.5 P9.1@3169.8,447
VBAT: C21.2 C22.2 C23.2 C37.1 P5.2 Q1.3 R10.2 R31.1 U3.12 | length 2629.2
  Top Layer w15: U3.12@112.9,996.12 112.8,996.21 112.8,1116.31 142.8,1146.31 C21.2@142.8,1156
  Top Layer w30: C21.2@142.8,1156 259.01,1156 C23.2@259.6,1156.59 v1(290.51,1156.59) ; R10.2@288.2,257.6 288.2,231.8 336.45,183.55 336.45,66.35 424.2,-21.4 541.56,-21.4 P5.2@670.28,-150.12 717.58,-150.12 Q1.3@753.58,-114.12 753.58,-9.72 C37.1@758.88,-4.42
  Bottom Layer w30: v1(290.51,1156.59) 290.51,229.65 P5.2@670.28,-150.12
VCC: C27.1 C28.2 P6.22 Q1.2 R22.1 U4.7 | length 1979.5
  Top Layer w10: 2218.6,-171.1 P6.22@2218.6,23
  Top Layer w30: Q1.2@790.58,-194.12 817.98,-194.12 C27.1@996.08,-16.02 ; R22.1@1045.98,85.48 996.08,35.58 C27.1@996.08,-16.02 ; U4.7@1222.16,-13.82 1220.76,-15.22 C28.2@1083.08,-15.22 1082.28,-16.02 C27.1@996.08,-16.02 ; v1(1846,-199.4) 2190.3,-199.4 2218.6,-171.1
  Signal Layer 1 w30: v1(1149.8,-14.9) 1334.3,-199.4 v1(1846,-199.4)
VCOM: C50.2 U7.10 | length 96.6
  Top Layer w13: C50.2@3033.3,425.3 3044.8,413.8 U7.10@3044.8,333.5
VOICE_3.3V: C58.2 R46.2 U8.3 | length 836.7
  Top Layer w15: R46.2@2278.6,1240.2 2326.4,1192.4 v1(2326.4,1089.9) ; v1(2740.4,1199.6) 2740.6,1199.8 U8.3@2788.67,1199.8 2898.3,1199.8 C58.2@2933.1,1165
  Signal Layer 1 w15: v1(2326.4,1089.9) 2630.7,1089.9 v1(2740.4,1199.6)
VOICE_DACL: C63.1 R50.2 U8.1 | length 586.6
  Top Layer w15: U8.1@2788.67,1149.8 2788.67,1084.03 2825.5,1047.2 C63.1@2934.7,1047.2 2894.82,1007.32 2894.82,713.78 R50.2@2901.6,707
VOICE_DACR: C66.1 R51.2 U8.2 | length 652.9
  Top Layer w15: U8.2@2788.67,1174.8 2865.5,1174.8 C66.1@2933.3,1107 v1(2884.5,1107) ; R51.2@2959.1,707.5 2960.3,708.7 v1(2960.3,751.8)
  Bottom Layer w15: v1(2884.5,1107) 2884.5,1043.3 2960.3,967.5 v1(2960.3,751.8)
VOICE_SD_CLK: P10.5 R43.2 U8.17 | length 798.4
  Top Layer w15: R43.2@2318.8,1324.4 2319.2,1324.8 U8.17@2574.1,1324.8
  Top Layer w20: P10.5@1969.61,1049.4 1969.61,1185.71 2108.3,1324.4 R43.2@2318.8,1324.4
VOICE_SD_CMD: P10.3 U8.18 | length 920.5
  Top Layer w15: v1(2337.4,1264.1) 2373.1,1299.8 U8.18@2574.1,1299.8
  Top Layer w20: P10.3@1883,1049.4 1883,1264 v1(1883.1,1264.1)
  Signal Layer 1 w15: v1(1883.1,1264.1) v1(2337.4,1264.1)
VOICE_SD_DAT: P10.7 U8.19 | length 655.5
  Top Layer w15: P10.7@2056.23,1049.4 v1(2056.23,1124.9) ; v1(2497.2,1261) 2511,1274.8 U8.19@2574.1,1274.8
  Signal Layer 1 w15: v1(2056.23,1124.9) 2361.1,1124.9 v1(2497.2,1261)
VOICE_VCC: C56.2 C57.2 C64.2 C65.2 D8.2 U8.4 U9.6 | length 1556
  Top Layer w15: U8.4@2788.67,1224.8 2931.8,1224.8 C57.2@2933.4,1223.2
  Top Layer w30: C57.2@2933.4,1223.2 2934.3,1224.1 C56.2@2934.3,1280.7 2934.3,1443.88 D8.2@2933.1,1445.08 v1(3001.98,1445.08) ; v1(3001.98,587.12) v1@3002.1,587 ; v1@3003.2,585.9 v1@3002.1,587 ; U9.6@3120.7,667.3 C65.2@3120.7,587 ; C64.2@3121.4,527.6 3120.7,528.3 C65.2@3120.7,587 ; C65.2@3121.4,587 C65.2@3120.7,587 ; v1@3002.1,587 C65.2@3120.7,587
  Bottom Layer w30: v1(3001.98,587.12) v1(3001.98,1445.08)
pads on no net: K1.2 K1.4 P6.A P6.B P8.2 P10.1 P10.2 P10.8 P10.9 U1.7 U1.8 U1.9 U1.15 U1.16 U1.17 U1.18 U1.34 U1.38 U1.39 U1.40 U1.41 U1.42 U1.43 U1.44 U1.45 U1.46 U1.59 U1.60 U1.61 U1.62 U1.67 U1.70 U1.71 U1.73 U1.77 U1.88 U1.89 U1.90 U1.91 U1.95 U1.96 U1.97 U1.98 U2.2 U2.3 U2.4 U2.5 U2.6 U2.7 U2.14 U2.15 U2.16 U2.17 U2.19 U2.21 U2.22 U4.2 U4.3 U7.1 U7.2 U7.3 U7.6 U7.15 U7.21 U8.9 U8.11 U8.12 U8.13 U8.14 U8.15 U8.16 U8.20 U8.21

## Polygon pours and split planes (outlines as drawn)
GND on Top Layer "Top Layer-No Net" (solid, remove dead copper, pour order 36): -809.8,1463.2 -809.8,1650.3 -583.2,1876.9 -391.2,2068.9 894.3,2068.9 3361.7,2068.9 3524.2,1906.4 3839.4,1591.2 3839.4,1315.4 3839.4,-344.3 3637.5,-546.2 3593.2,-590.5 3460.2,-590.5 3310.5,-590.5 3260,-540 3236.7,-516.7 3236.7,-224.8 3236.7,13.8 3199.7,50.8 3186.6,63.9 3186.6,81.9 3186.6,122.6 3173,136.2 3160.9,136.2 3157.4,136.2 3149.7,128.5 3135.1,113.9 3135.1,-36.6 3135.1,-99.7 3125.9,-108.9 3123.9,-110.9 3104.6,-110.9 2925.9,-110.9 2917.2,-119.6 2915.3,-121.5 2915.3,-149.2 2915.3,-505.7 2835.3,-585.7 2807.1,-613.9 2615.7,-613.9 -582.2,-613.9 -833.2,-362.9
GND on Signal Layer 1 "Top Layer-No Net" (solid, remove dead copper, pour order 38): -774.4,1291.9 -253.6,1812.7 510.8,1812.7 3526.4,1812.7 3753.2,1585.9 3854,1485.1 3854,813.1 3854,-530.9 3702.8,-682.1 3652.4,-732.5 3459.2,-732.5 3385.9,-732.5 3261.9,-608.5 3236.5,-583.1 3236.5,-226.7 3236.5,13.1 3218.4,31.2 3186.2,63.4 3186.2,89.4 3186.2,123.2 3176.8,132.6 3173.3,136.1 3162.2,136.1 3156.3,136.1 3152.4,132.2 3132.8,112.6 3132.8,-68.2 3132.8,-99.2 3126.9,-105.1 3125.7,-106.3 3085.2,-106.3 2930.4,-106.3 2917.5,-119.2 2915.5,-121.2 2915.5,-138.5 2915.5,-559.2 2806.6,-668.1 2679.3,-795.4 -285.8,-795.4 -514.4,-795.4 -769.3,-540.5
GND on Bottom Layer "Top Layer-No Net" (solid, remove dead copper, pour order 40): -699,1551.7 -118.8,2131.9 522.9,2131.9 3467.8,2131.9 3819.4,1780.3 3863.4,1736.3 3863.4,804.5 3863.4,-303.1 3722.7,-443.8 3643.6,-522.9 3432.6,-522.9 3311.7,-522.9 3246.4,-457.6 3235.9,-447.1 3235.9,-242.3 3235.9,14.6 3215,35.5 3185,65.5 3185,68.1 3185,123.7 3173.9,134.8 3172.6,136.1 3164,136.1 3157.1,136.1 3152,131 3132.2,111.2 3132.2,98.1 3132.2,-99.8 3125.6,-106.4 3124.9,-107.1 3121,-107.1 2930.3,-107.1 2921.5,-115.9 2915.6,-121.8 2915.6,-135.8 2915.6,-562.3 2871.4,-606.5 2751.9,-726 -376.9,-726 -437.6,-726 -680.7,-482.9
GND on GND (split plane): 195 vertices, not listed, extent -229.8,-228.65 3614.48,1645.97

## Keep-outs
Keep-Out Layer:
  lines w5: -236.52,1245.53 -236.52,175.78 ccw(c194.28,195.38) 213.88,-235.42 ; -236.47,1239.08 cw(c171.12,1245.53) 164.67,1653.12 3196.78,1653.18 cw(c3196.63,1227.83) 3621.98,1227.68 3621.98,172.48 ; 175.78,-235.42 3218.38,-235.42 ccw(c3202.88,183.08) 3621.38,198.58

## Other copper
GND (plane layer: these items are gaps in the copper):
  rectangle: 2922,-233.7 3251.6,-117.3
  rectangle: 1285.8,-53 1381.5,68.7
  lines w5: 172.37,-238.7 186.7,-238.7
  lines w20: -239.89,1231.88 cw(c185.73,1230.19) -238.74,1261.52 -238.74,1272.28 cw(c-236.22,1272.28) -237.59,1274.39 ; -239.89,1231.88 ccw(c-237.37,1231.87) -238.74,1229.75 -238.74,173.28 ccw(c-236.22,173.28) -237.88,171.39 ; -239.89,1231.88 -239.89,1231.88 ; -237.88,171.39 ccw(c187.46,186.88) 172.14,-238.46 ccw(c173.28,-236.22) 173.28,-238.74 3214.28,-238.74 ccw(c3214.28,-236.22) 3216.19,-237.86 ccw(c3197.83,187.36) 3623.06,169.24 ; -237.88,171.39 -237.88,171.39 ; -237.59,1274.39 cw(c185.73,1230.19) 142.53,1653.61 ; -237.59,1274.39 -237.59,1274.39 ; 142.53,1653.61 cw(c145.05,1653.54) 145.05,1656.06 3197.51,1656.06 cw(c3197.51,1653.54) 3198.91,1655.63 ; 142.53,1653.61 142.53,1653.61 ; 3198.91,1655.63 cw(c3199.78,1653.28) 3199.79,1655.79 ; 3198.91,1655.63 3198.91,1655.63 ; 3199.79,1655.79 cw(c3198.1,1230.17) 3623.72,1230.88 ; 3199.79,1655.79 3199.79,1655.79 ; 3623.06,169.24 ccw(c3622.05,171.54) 3624.56,171.54 3624.56,1229.01 ccw(c3622.05,1229.01) 3623.72,1230.88 ; 3623.06,169.24 3623.06,169.24 ; 3623.72,1230.88 3623.72,1230.88

## Silkscreen, mask and mechanical layers (free items; w line width, h text height)
Top Overlay:
  text "OUTB2 / 3.3V / EB2 / EB1 / GND / OUTB1" at 3334.9,859.2 h50
  text "TXD / RXD / GND" at -41.9,453.3 h50
  text "OUTA2 / 3.3V / EA2 / EA1 / GND / OUTA1" at -194.4,179.8 h50
  text "+" at 647.48,-100.62 h100
  text "-" at 541.28,-101.92 h100
Bottom Overlay:
  text "+" at 691.08,-101.02 h100
  text "-" at 586.18,-101.92 h100
Mechanical 1:
  lines w5: -237.37,1231.87 cw(c185.73,1230.19) 189.78,1653.28 ; -236.22,173.28 -236.22,1272.28 ; -235.63,190.93 ccw(c187.46,186.88) 185.78,-236.22 ; 145.05,1653.54 3197.51,1653.54 ; 173.28,-236.22 453.48,-236.22 587.22,-236.22 ; 568.98,-236.22 1397,-236.22 ; 1356.88,-236.22 2182.2,-236.22 ; 2143.88,-236.22 2964.5,-236.22 ; 2931.45,-236.22 3214.28,-236.22 ; 3193.78,-235.72 ccw(c3197.83,187.36) 3620.93,185.68 ; 3199.78,1653.28 cw(c3198.1,1230.17) 3621.19,1226.12 ; 3622.05,171.54 3622.05,1229.01
Drill Drawing:
  text "'.Legend'" at 4120.1,690 h100

## Text inside footprints (layer, text, board x,y; h text height)
P6: Top Overlay "24" at 2142.99,46 h30 r180; Top Overlay "1" at 2707.99,42 h30 r180
P8: Top Overlay "C3" at 3060.64,-147.8 h60 r180